# Altium PCB Cade.PcbDoc
Units mil, origin at the board's own origin, x right, y up, seen from the top; angles counter-clockwise.
Board outline 1415 x 1380 mil, 2 copper layers (Top Layer, Bottom Layer); 4 components, 5 nets, 15 pads, 2 vias.
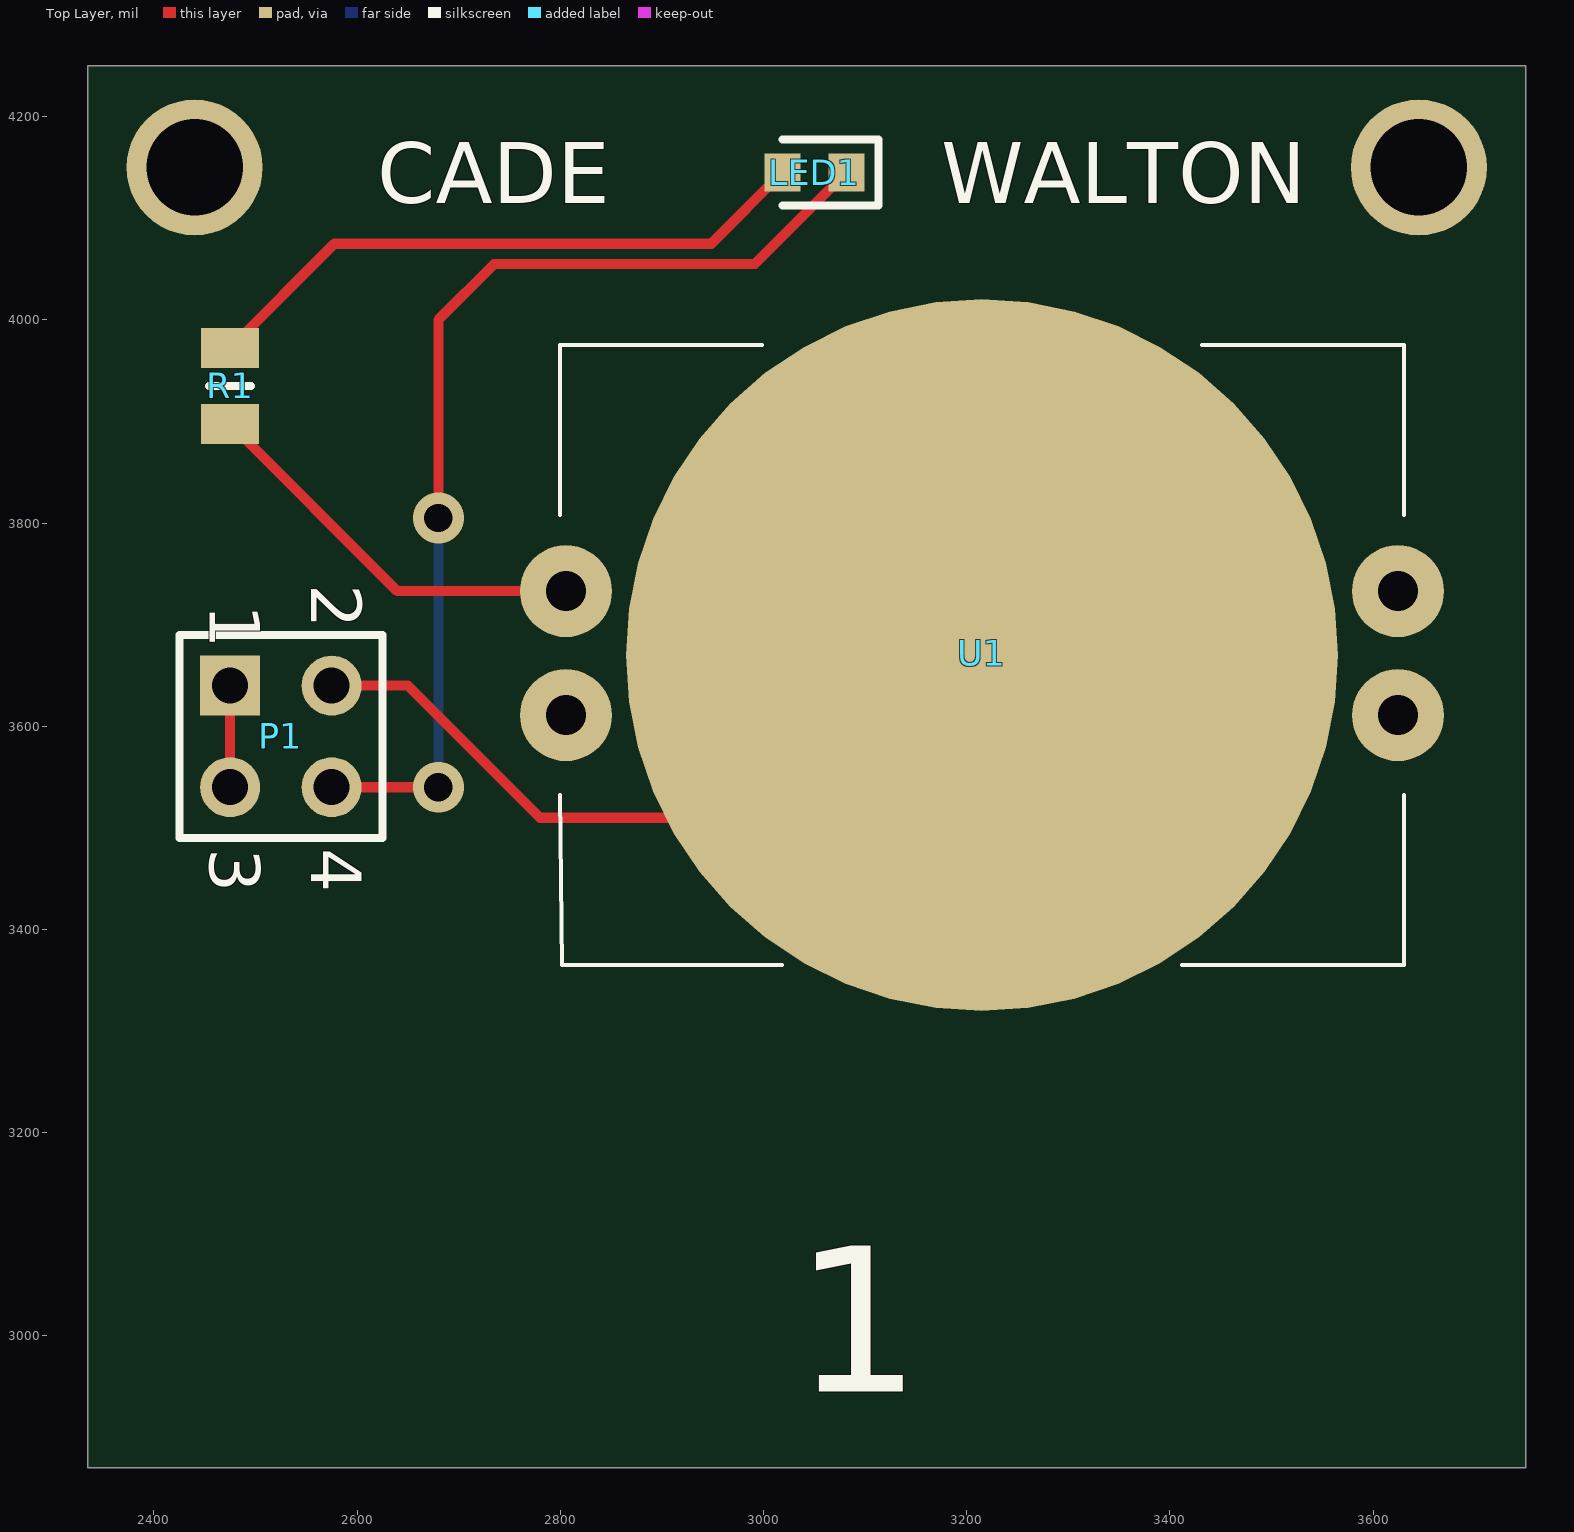
[diagram p0: Top Layer view]
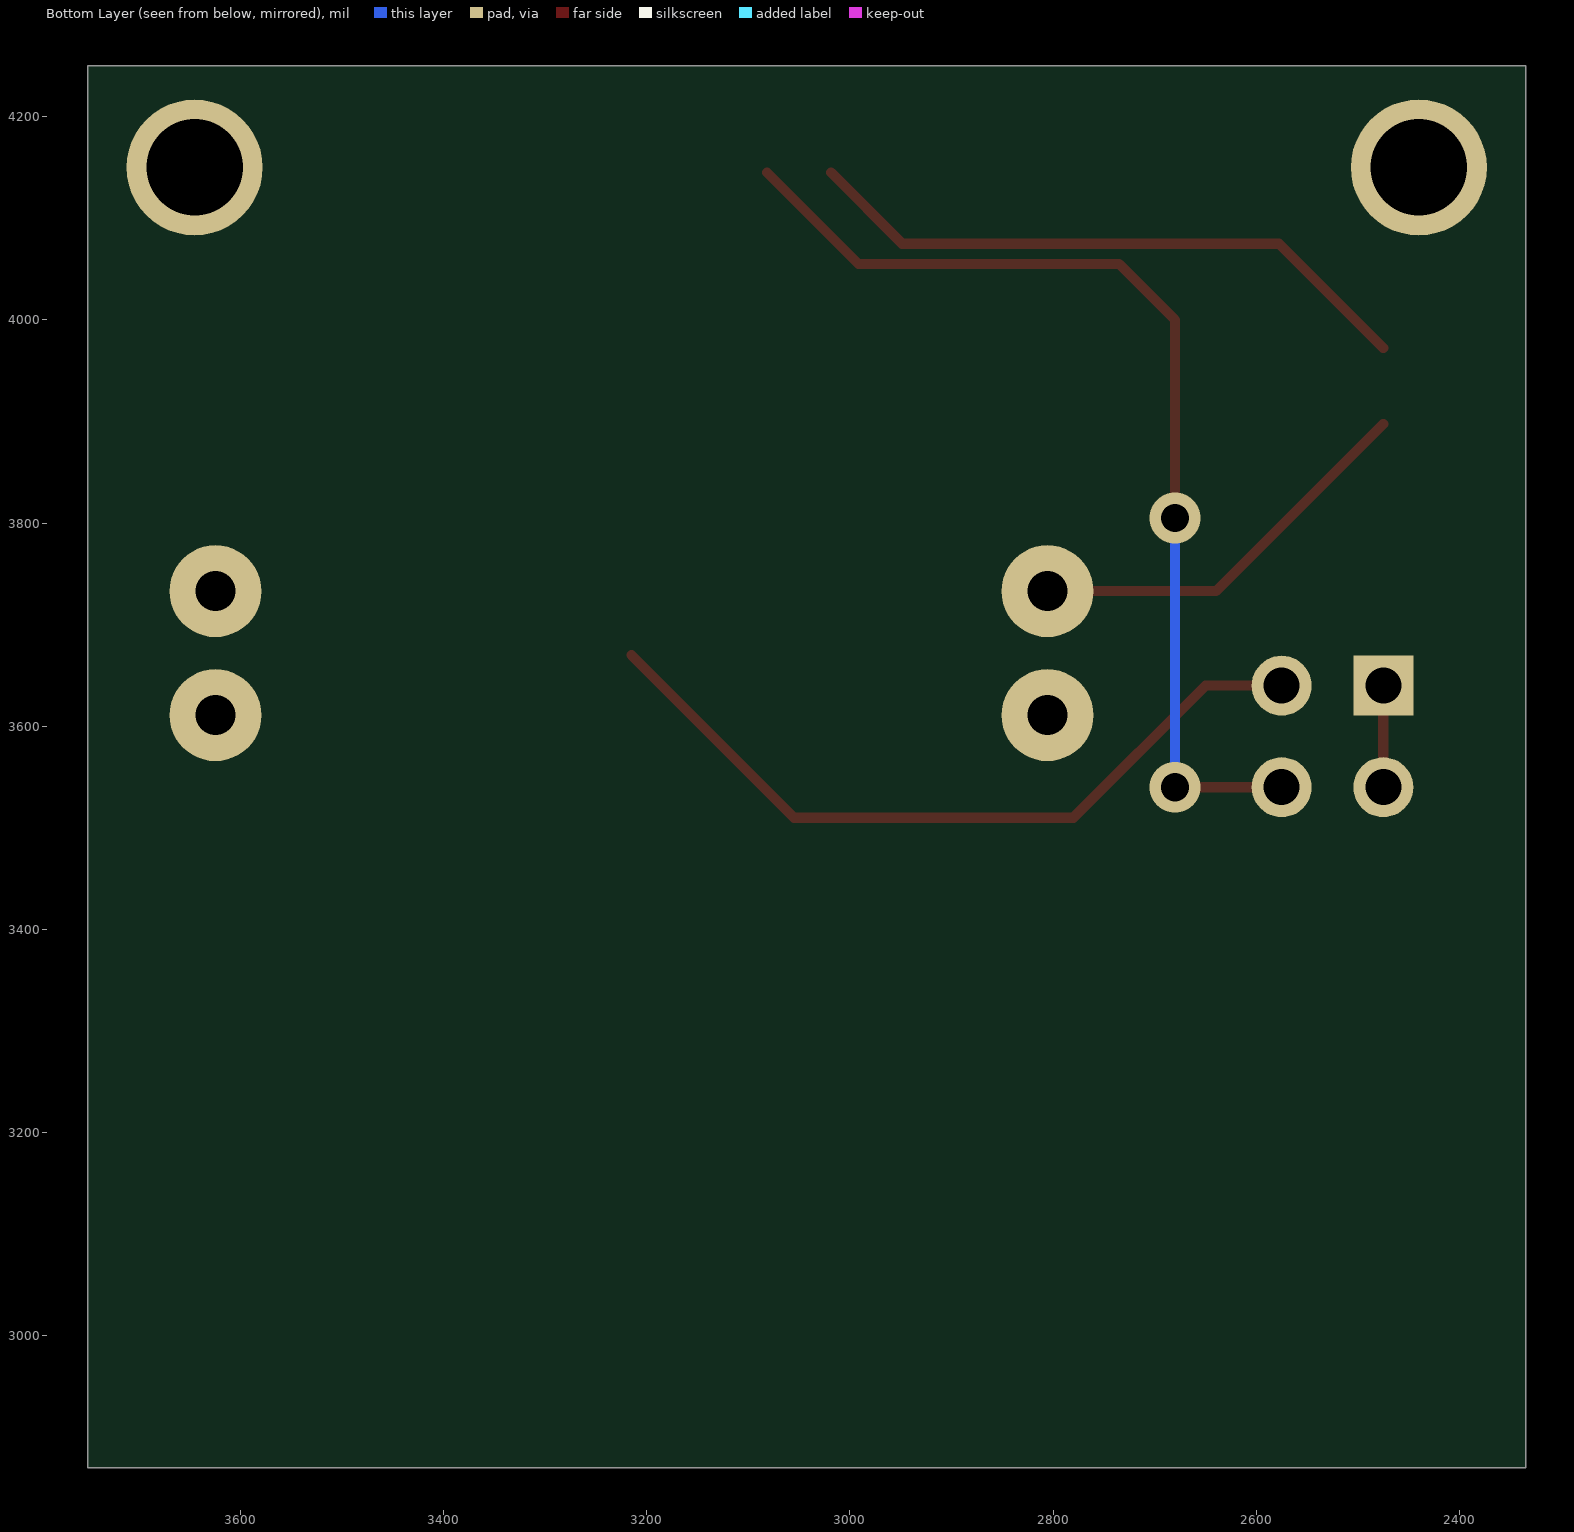
[diagram p1: Bottom Layer view, seen from below]

## Layer stack, top to bottom
Top Solder: solder mask 0.4, Solder Resist, Dk 3.5
Top Layer: signal copper 1.4
Dielectric 1: dielectric 12.6, FR-4, Dk 4.8
Bottom Layer: signal copper 1.4
Bottom Solder: solder mask 0.4, Solder Resist, Dk 3.5

## Board outline
3750,4250 3750,2870 2335,2870 2335,4250
cut-out: 2110,3170

## Design rules (kind name [scope] priority, off if disabled: settings)
Clearance [All] p1: gap=10 ignorepadtopadclearanceinfootprint=FALSE except(0: Arc-Hole Track-Hole SMDPad-Hole THPad-Hole Via-Hole Fill-Hole Poly-Hole Region-Hole Text-Hole)
PolygonConnect [All] p1: connectstyle=Relief reliefconductorwidth=10 reliefentries=4 polygonreliefangle="90 Angle" airgapwidth=10
RoutingVias [All] p1: holewidth=28 width=50 viastyle="Through Hole" minholewidth=28 minwidth=50 maxholewidth=28 maxwidth=50
SolderMaskExpansion [All] p1: expansion=4
Width [All] p1: maxlimit=10 minlimit=10 preferedwidth=10
30 further rules are at their usual default settings.

## Components (designator, comment, footprint, x,y, rotation, side; value= is the part's Value field where it differs from the comment)
LED1 "LTST-C191KGKT" LEDC1608X55N 3050,4145 r180 top
P1 "Header 2X2" HDR2X2 2475,3640 r270 top
R1 "0-10ohm" RESC2012X60N 2475,3935 r270 top
U1 "BAT-HLD-001-THM" BATHLD001THM 3215,3670 r180 top

## Footprints (in the part's own frame and the unit in brackets; to place one, negate y for a bottom-side part, rotate by r counter-clockwise, add the part's x,y. Pads: shape width x height; smd on the part's side, far side on the other; paste and mask are expansions set on the pad)
BATHLD001THM [mm]
  round 2.3 hole 1: 1(-10.4,1.5) 2(-10.4,-1.6) 3(10.4,-1.6) 4(10.4,1.5)
  round 17.8 smd: 5(0,0)
  silkscreen extent -10.55,-7.75 10.55,7.75
HDR2X2 [mm] "Connector; Header; 2x2 Position"
  rect 1.5x1.5 hole 0.9: 1(0,0)
  round 1.5 hole 0.9: 2(0,2.54) 3(2.54,0) 4(2.54,2.54)
  silkscreen extent -1.27,-1.27 3.81,3.81
LEDC1608X55N [mm]
  rect 0.9x0.95 smd: 1(-0.8,0) 2(0.8,0)
  silkscreen extent -1.6,-0.82 0.8,0.82
RESC2012X60N [mm]
  rect 1x1.45 smd: 1(-0.95,0) 2(0.95,0)
  silkscreen extent 0,-0.53 0,0.53, body extent -1,-0.63 1,0.63, height 0.6

## Part data
LED1: "LED", Manufacturer_Name=Lite-On, Mouser Part Number=859-LTST-C191KGKT, RS Part Number=6921010P, Datasheet Link=http://www.mouser.com/ds/2/239/S_110_LTST-C191KGKT-369560.pdf, Height=0.55mm, Manufacturer_Part_Number=LTST-C191KGKT, Mouser Price/Stock=https://www.mouser.com/Search/Refine.aspx?Keyword=859-LTST-C191KGKT, RS Price/Stock=http://uk.rs-online.com/web/p/products/6921010P
P1: "Header, 2-Pin, Dual row", LatestRevisionDate=17-Jul-2002, LatestRevisionNote="Re-released for DXP Platform.", Publisher="Altium Limited"
R1: library part CRCW0805160RFKEAHP, "Resistor", Manufacturer_Name=Vishay, Mouser Part Number=71-CRCW0805160RFKEAH, Datasheet Link=https://componentsearchengine.com/Datasheets/1/CRCW08051R00FKEAHP.pdf, Height=0.6mm, Manufacturer_Part_Number=CRCW0805160RFKEAHP, Mouser Price/Stock=https://www.mouser.com/Search/Refine.aspx?Keyword=71-CRCW0805160RFKEAH
U1: "Undefined or Miscellaneous", Manufacturer_Name="Linx Technologies", Mouser Part Number=712-BAT-HLD-001-THM, Datasheet Link="http://www.mouser.com/datasheet/2/238/BAT-HLD-001-THM Diagram-1175214.pdf", Height=4.2mm, Manufacturer_Part_Number=BAT-HLD-001-THM, Mouser Price/Stock=https://www.mouser.com/Search/Refine.aspx?Keyword=712-BAT-HLD-001-THM

## Free pads (board coordinates)
  round 133.86 hole 95: 3(2440,4150) 4(3645,4150)

## Via types
v1: diameter 50, hole 28, Top Layer to Bottom Layer, 2 vias

## Nets (pads, with @x,y where several pads share a name; then routed paths per layer and width w, separated by ;. In a path a pad name is that pad's centre, name@x,y a point inside that pad or via, vN(x,y) a via of type N, cw(c..) or ccw(c..) an arc to the next point about the centre after c; other vN are vias at no path point)
NetLED1_1: LED1.1 P1.4 | length 1026.6
  Top Layer w10: P1.4 v1(2680,3540) ; v1(2680,3805) 2680,4000 2735,4055 2991.5,4055 LED1.1
  Bottom Layer w10: v1(2680,3540) v1(2680,3805)
NetLED1_2: LED1.2 R1.1 | length 615
  Top Layer w10: R1.1 2577.6,4075 2948.5,4075 LED1.2
NetP1_1: P1.1 P1.3 | length 100
  Top Layer w10: P1.3 P1.1
NetP1_2: P1.2 U1.5 | length 760.1
  Top Layer w10: P1.2 2650,3640 2780,3510 3055,3510 U1.5
NetR1_2: R1.2 U1.3 | length 398.7
  Top Layer w10: R1.2 2639.61,3732.99 U1.3
pads on no net: U1.1 U1.2 U1.4

## Silkscreen, mask and mechanical layers (free items; w line width, h text height)
Top Overlay:
  text "CADE" at 2620,4115 h60
  text "WALTON" at 3175,4115 h60
  text "1" at 3030,2945 h300
Mechanical 13:
  lines w10: 2336.37,2969.66 2335.58,2954.69 ccw(c2410,2950.78) 2410,2876.25 ; 2336.52,2970 2336.52,4156.47 ; 2336.54,4156.49 2334.41,4194.74 cw(c2386.68,4197.65) 2386.68,4250 3701.16,4250 cw(c3701.16,4203.42) 3747.66,4206.16 3747.66,2969.64 3748.54,2968.76 cw(c3660,2963.55) 3660,2874.85 2410,2874.85

## Text inside footprints (layer, text, board x,y; h text height)
P1: Top Overlay "3" at 2455,3480 h50 r270; Top Overlay "4" at 2555,3480 h50 r270; Top Overlay "2" at 2555,3740 h50 r270; Top Overlay "1" at 2455,3720 h50 r270